# Altium PCB Ard_regulator.PcbDoc
Units mil, origin at the board's own origin, x right, y up, seen from the top; angles counter-clockwise.
Board outline 2700 x 2100 mil, 2 copper layers (Top Layer, Bottom Layer), stack 62.8 mil thick; 15 components, 31 nets, 82 pads, 0 vias.
Unrouted connection lines stored in the file: 1.
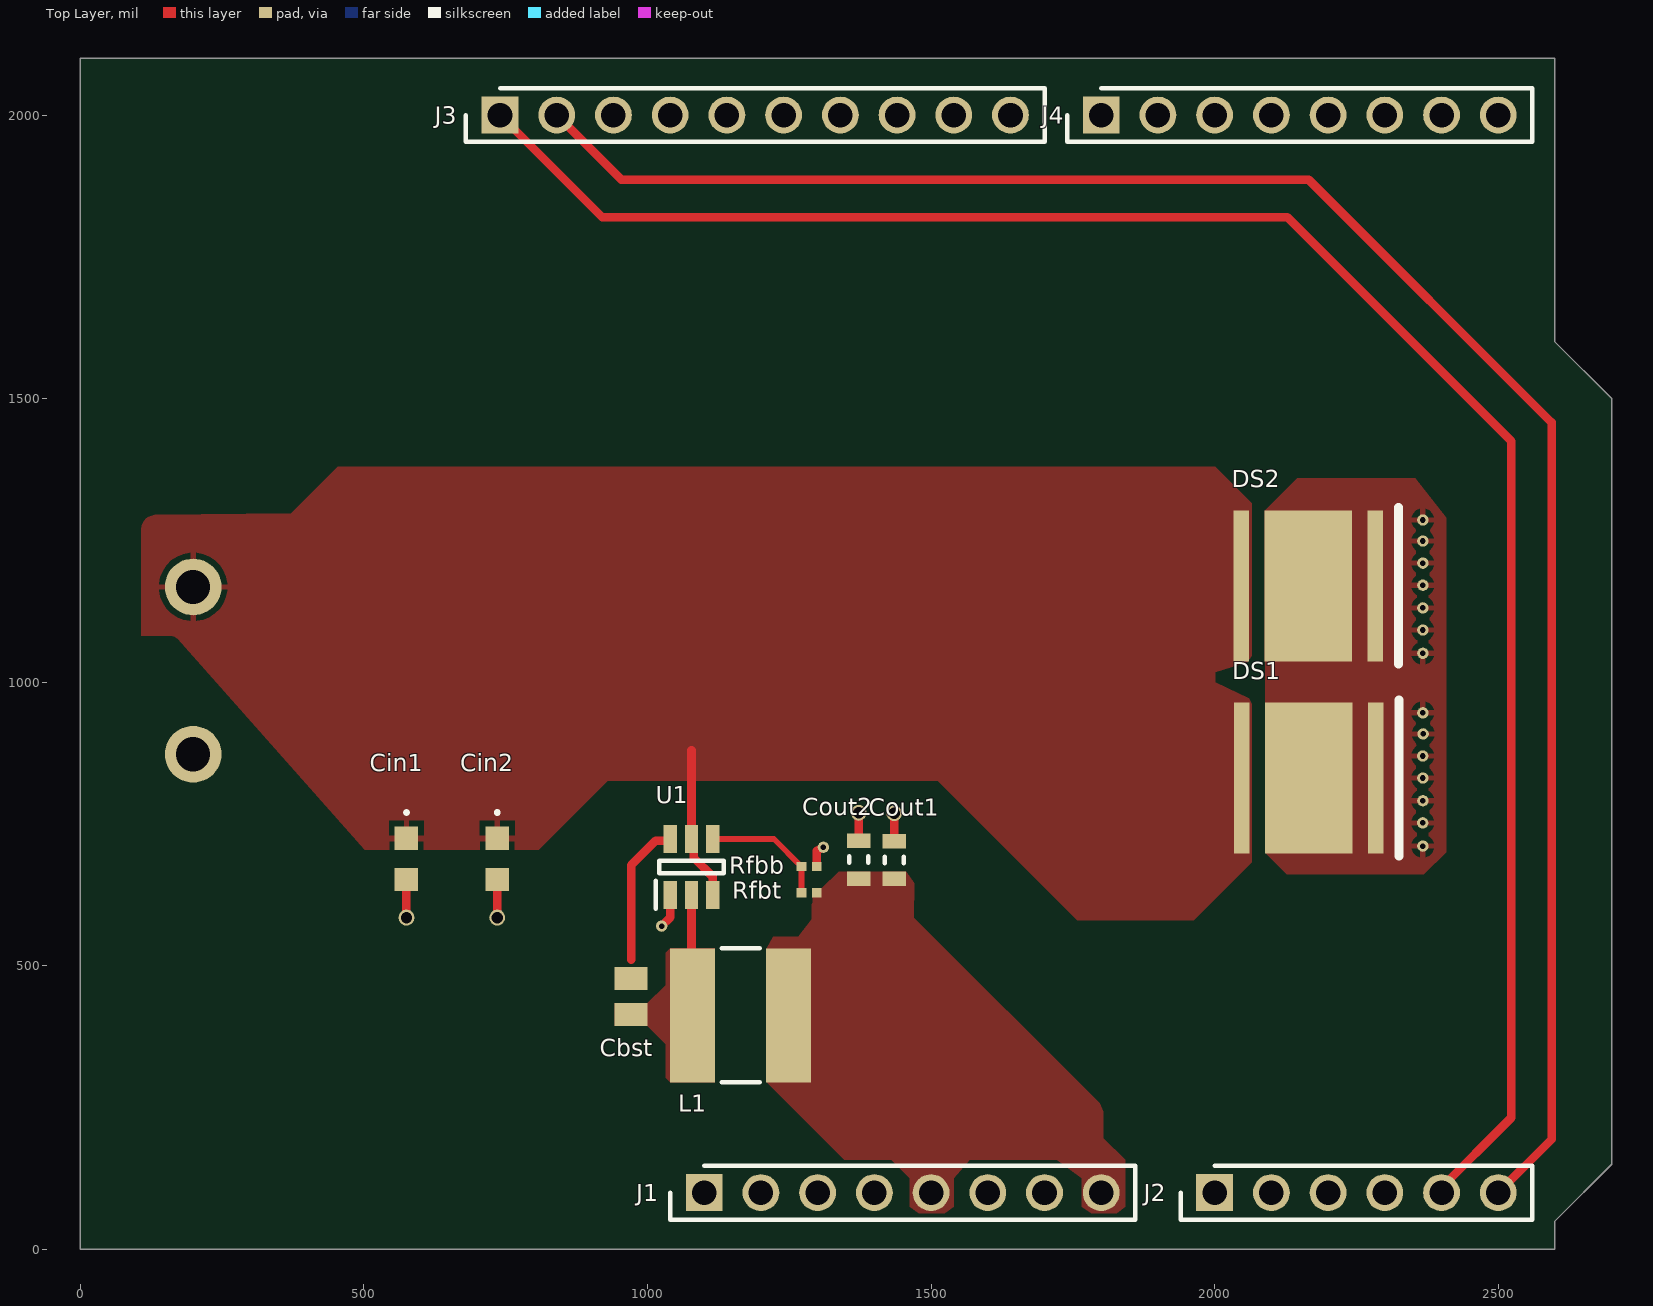
[diagram p0: Top Layer view]
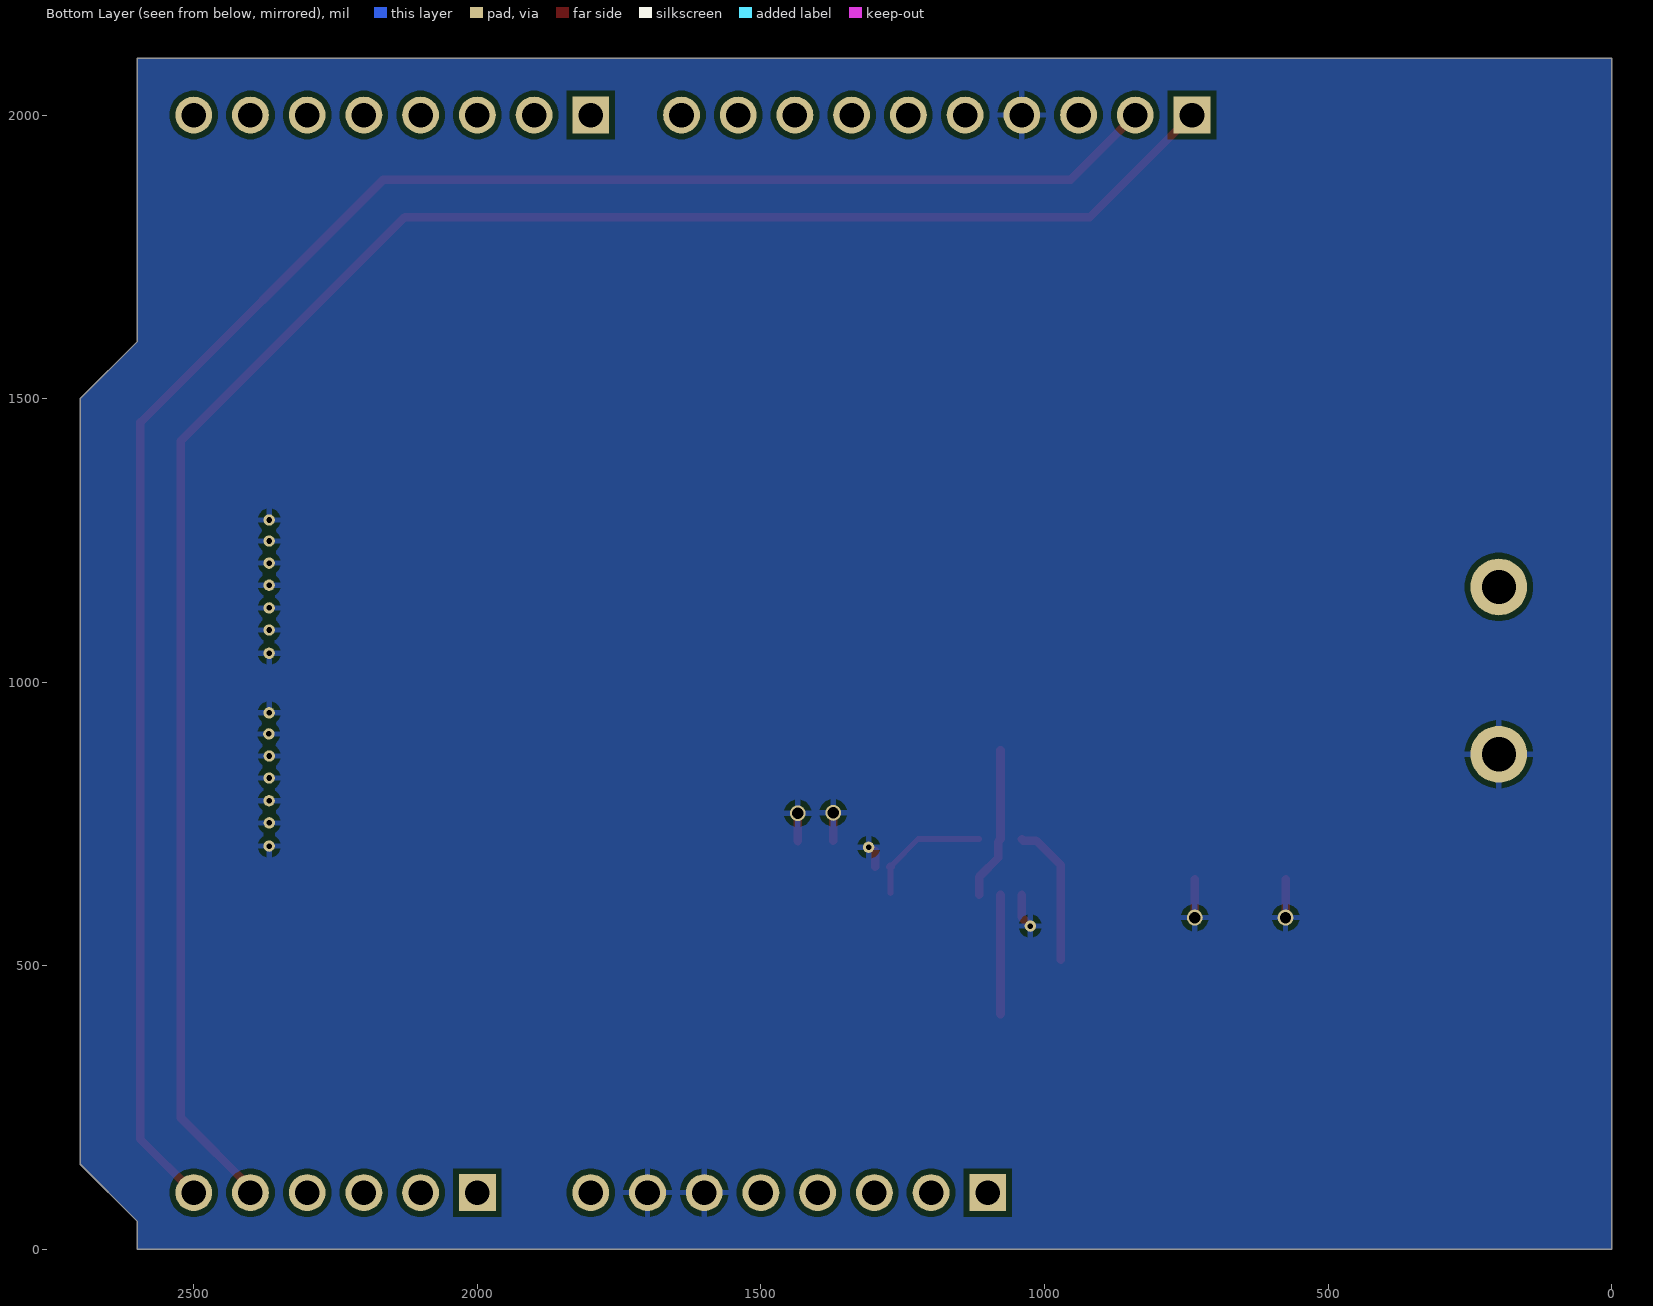
[diagram p1: Bottom Layer view, seen from below]
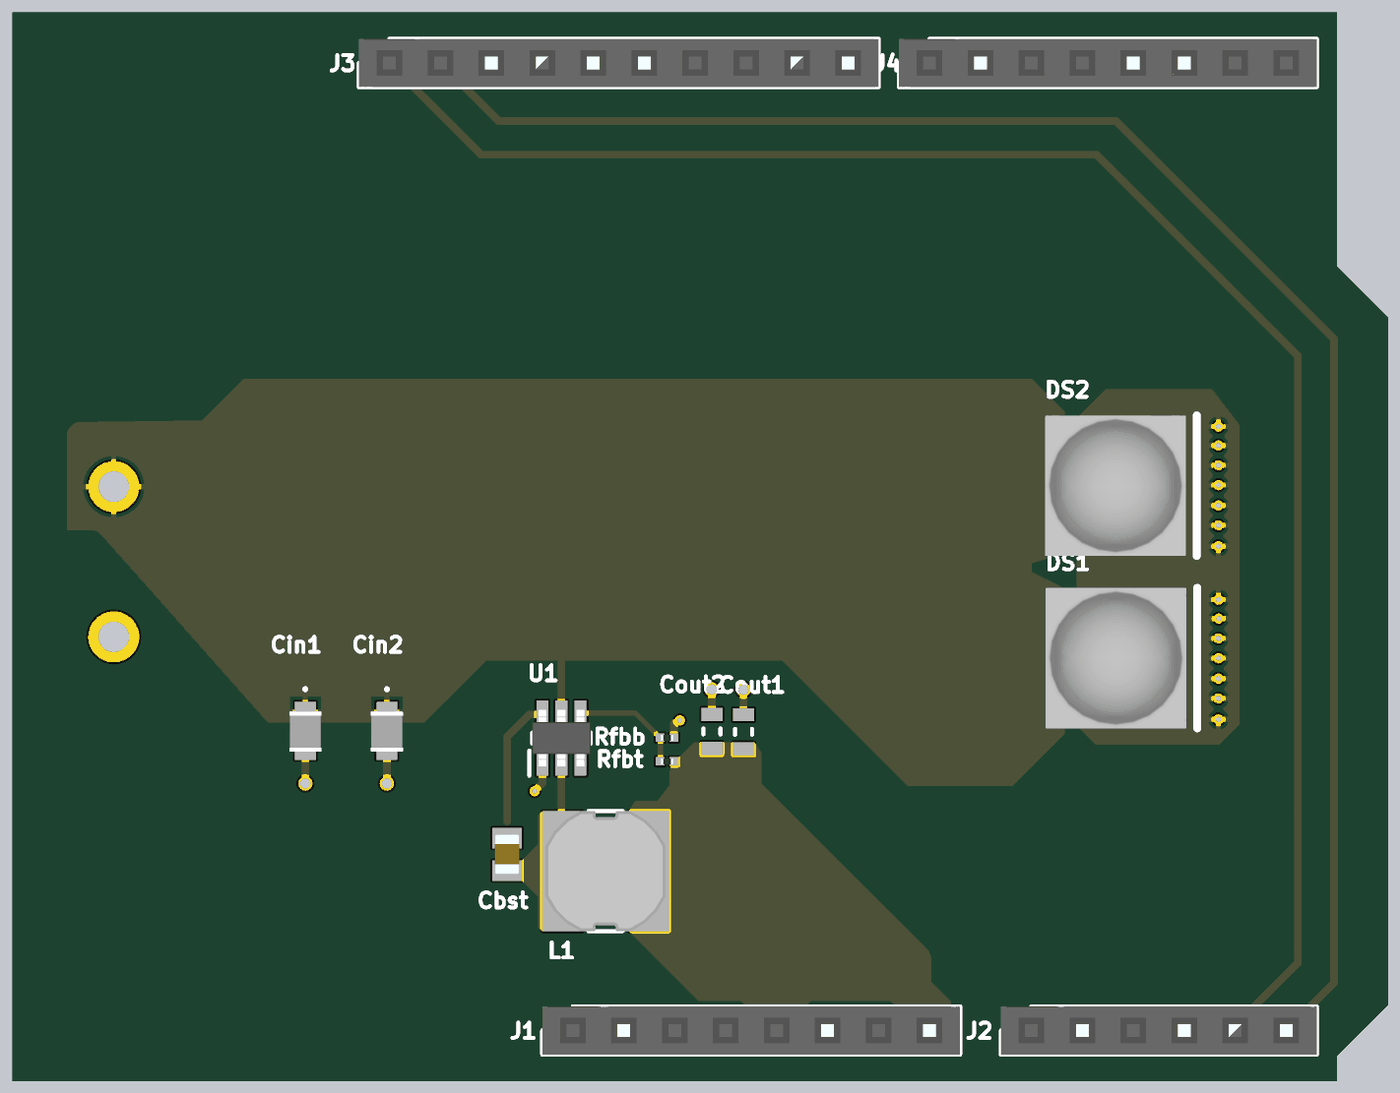
[diagram p2: 3D render of the assembled board from above, using the file's embedded part models]

## Layer stack, top to bottom
Top Solder: solder mask 0.4, Solder Resist, Dk 3.5
Top Layer: signal copper 1.4
Dielectric 1: dielectric 60, FR-4, Dk 4.8
Bottom Layer: signal copper 1.4
Bottom Solder: solder mask 0.4, Solder Resist, Dk 3.5

## Board outline
0,0 0,2100 2600,2100 2600,1600 2700,1500 2700,150 2600,50 2600,0

## Design rules (kind name [scope] priority, off if disabled: settings)
Clearance [All] p1: gap=10 ignorepadtopadclearanceinfootprint=TRUE
PolygonConnect PolygonConnect_1 [All] p1: connectstyle=Relief reliefconductorwidth=10 reliefentries=4 polygonreliefangle="90 Angle" airgapwidth=10
RoutingVias [All] p1: holewidth=10 width=18 viastyle="Through Hole" minholewidth=6 minwidth=14 maxholewidth=28 maxwidth=50
SolderMaskExpansion [All] p1: expansion=4 istentingtop=FALSE
SupplyNets "Schematic Supply Nets_4" [InNet('+5V')] p1: voltage=0.000
SupplyNets "Schematic Supply Nets_1" [InNet('+12V')] p2: voltage=0.000
SupplyNets "Schematic Supply Nets" [InNet('GND')] p3: voltage=0.000
Width [All] p1: maxlimit=30 minlimit=5 preferedwidth=10
30 further rules are at their usual default settings.

## Components (designator, comment, footprint, x,y, rotation, side; value= is the part's Value field where it differs from the comment)
Cbst "08053C104KAT2A" CAPC2012X94N 971,445.89 r90 top
Cin1 "C2012X5R1V106K085AC" C2012_Commercial 575,688.58 r270 top
Cin2 "C2012X5R1V106K085AC" C2012_Commercial 735,688.58 r270 top
Cout1 "C1608X5R1A226M080AC" CAPC1608X100X20ML10 1435,686.54 r270 top
Cout2 "C1608X5R1A226M080AC" CAPC1608X100X20ML10 1372.85,687.24 r270 top
DS1 "MKRAWT-00-0000-0D0HG235H" CREE-MK-R-2_V 2165.9,831.31 r0 top
DS2 "MKRAWT-00-0000-0D0HG235H" CREE-MK-R-2_V 2165,1170 r0 top
J1 "SSQ-108-03-T-S" RHDR8W64P254_1X8_2083X241X851P 1100,100 r180 top locked
J2 "SSQ-106-03-T-S" RHDR6W64P254_1X6_1575X241X851P 2000,100 r180 top locked
J3 "SSQ-110-03-T-S" RHDR10W64P254_1X10_2591X241X851P 740,2000 r180 top locked
J4 "SSQ-108-03-T-S" RHDR8W64P254_1X8_2083X241X851P 1800,2000 r180 top locked
L1 "SRN6045-4R7Y" SRN6045_1 1164.24,412.76 r0 top
Rfbb "RC0201FR-0710KL" RESC0603X26N 1285,675 r0 top
Rfbt "RC0201FR-0756K2L" RESC0603X26N 1285,628.46 r180 top
U1 "TPS562200DDCR" SOT95P280X110-6N 1077.6,674.21 r90 top

## Footprints (in the part's own frame and the unit in brackets; to place one, negate y for a bottom-side part, rotate by r counter-clockwise, add the part's x,y. Pads: shape width x height; smd on the part's side, far side on the other; paste and mask are expansions set on the pad)
C2012_Commercial [mm]
  rect 1.05x1.05 smd: 1(-0.925,0) 2(0.925,0)
  silkscreen extent -2.12,-0.05 -2.03,0.05, body extent -0.96,-0.8 1.04,0.8, height 1.25
CAPC1608X100X20ML10 [mm] "Chip Capacitor, 2-Leads, Body 1.70x0.90mm, IPC Low Density"
  rect 0.65x1.05 smd: 1(-0.85,0) 2(0.85,0)
  silkscreen extent -0.15,-0.43 0.15,0.43, body extent -0.85,-0.45 0.85,0.45, height 1
CAPC2012X94N [mm]
  rect 1.02x1.47 smd: 1(-0.81,0) 2(0.81,0)
  body extent -1,-0.63 1,0.63, height 0.94
CREE-MK-R-2_V [mm] "SMD, 2-Leads, Body 7x7mm, Thermal Pad 3.9x6.76mm"
  rect 0.7x6.76 smd: 1(-3,0) 2(3,0)
  rect 3.9x6.76 smd: 3(0,0)
  silkscreen extent 4.05,-3.5 4.05,3.5, body extent -3.5,-3.5 3.5,3.5, height 4.1
RESC0603X26N [mm]
  rect 0.44x0.42 smd: 1(-0.34,0) 2(0.34,0)
  body extent -0.3,-0.15 0.3,0.15, height 0.26
RHDR6W64P254_1X6_1575X241X851P [mm]
  rect 1.65x1.65 hole 1.1: 1(0,0)
  round 1.65 hole 1.1: 2(-2.54,0) 3(-5.08,0) 4(-7.62,0) 5(-10.16,0) 6(-12.7,0)
  silkscreen extent -14.23,-1.2 1.53,1.2, body extent -14.23,-1.2 1.53,1.2, height 8.51
RHDR8W64P254_1X8_2083X241X851P [mm]
  rect 1.65x1.65 hole 1.1: 1(0,0)
  round 1.65 hole 1.1: 2(-2.54,0) 3(-5.08,0) 4(-7.62,0) 5(-10.16,0) 6(-12.7,0) 7(-15.24,0) 8(-17.78,0)
  silkscreen extent -19.31,-1.2 1.53,1.2, body extent -19.31,-1.2 1.53,1.2, height 8.51
RHDR10W64P254_1X10_2591X241X851P [mm]
  rect 1.65x1.65 hole 1.1: 1(0,0)
  round 1.65 hole 1.1: 2(-2.54,0) 3(-5.08,0) 4(-7.62,0) 5(-10.16,0) 6(-12.7,0) 7(-15.24,0) 8(-17.78,0) 9(-20.32,0) 10(-22.86,0)
  silkscreen extent -24.39,-1.2 1.53,1.2, body extent -24.39,-1.2 1.53,1.2, height 8.51
SOT95P280X110-6N [mm]
  rect 1.25x0.6 smd: 1(-1.25,0.95) 2(-1.25,0) 3(-1.25,-0.95) 4(1.25,-0.95) 5(1.25,0) 6(1.25,0.95)
  silkscreen extent -1.88,-1.45 0.28,1.6, body extent -1.4,-1.45 1.4,1.45, height 0.97
SRN6045_1 [mm]
  rect 2.01x6 smd: 1(-2.15,0) 2(2.15,0)
  silkscreen extent -0.85,-3 0.85,3, body extent -3,-3 3,3, height 4.5

## Part data
Cbst: "Capacitor", Manufacturer_Name="Kyocera AVX", Mouser Part Number=581-08053C104K, Arrow Part Number=08053C104KAT2A, Arrow Price/Stock=https://www.arrow.com/en/products/08053c104kat2a/avx?utm_currency=USD&region=nac, Datasheet Link=http://datasheets.avx.com/X7RDielectric.pdf, Height=0.94mm, Manufacturer_Part_Number=08053C104KAT2A, Mouser Price/Stock=https://www.mouser.co.uk/ProductDetail/KYOCERA-AVX/08053C104KAT2A?qs=EihRZLdKnF2GcTBzDkE%2FiQ%3D%3D
Cin1 Cin2: "Capacitor", Manufacturer_Name=TDK, Mouser Part Number=810-C2012X5R1V106K0C, Arrow Part Number=C2012X5R1V106K085AC, Arrow Price/Stock=https://www.arrow.com/en/products/c2012x5r1v106k085ac/tdk?region=nac, Datasheet Link=https://product.tdk.com/system/files/dam/doc/product/capacitor/ceramic/mlcc/catalog/mlcc_commercial_general_en.pdf, Height=0.75mm, Manufacturer_Part_Number=C2012X5R1V106K085AC, Mouser Price/Stock=https://www.mouser.co.uk/ProductDetail/TDK/C2012X5R1V106K085AC?qs=6JAMGB%252BEdky%252BlYMcTLhFyA%3D%3D
Cout1 Cout2: library part CMP-2000-05441-1, "Chip Capacitor, 22 uF, +/- 20%, 10 V, -55 to 85 degC, 0603 (1608 Metric), RoHS, Tape and Reel", Capacitance=22µF, Manufacturer=TDK, Operating Temperature=-55degC~85degC, Package / Case=0603(1608Metric), Package Description="2-Pin Surface Mount Device, Body 1.6 x 0.8 mm", Package Reference=603, PCN Part Number=MLCCPartNumberChange30/Nov/2012, Ratings=-, Standard Package=1, Temperature Coefficient=X5R, Tolerance=±20%, Voltage - Rated=10V, Applications=GeneralPurpose, Category=Capacitors, Datasheet URL=http://download.siliconexpert.com/pdfs/2015/4/21/15/54/45/779/tdk_/manual/37024850441143360mlcc_commercial_general_en.pdf, Datasheet Version=Mar-15, Design Resources=20WNon-IsolatedBuckLEDDriverUsingPLLNK460KG, Family=CeramicCapacitors, Features=-, Height - Seated (Max)=-, Kits=445-9014-KIT-ND-KITMLCC100PF-22UF060310-50V, Lead Spacing=-, Lead Style=-, Manufacturer URL=http://www.tdk.com/, Mounting Type=SurfaceMount,MLCC, Online Catalog=CSeries,GeneralPurpose, Other Names=445-9077-1, Packaging=CutTape(CT), Product Training Modules=CSeriesGeneralApplicationsSEAT,CCV,andTVCLDesignToolsGuidetoReplacinganElectrolyticCapacitorwithanMLCC, RoHS Information=RoHSCertificate-MLCC, Series=C, Size / Dimension="0.063\"Lx0.031\"W(1.60mmx0.80mm)", Thickness (Max)="0.035\"(0.90mm)"
DS1 DS2: library part CMP-2100-00977-1, "LED, White, 12 V, 2-Pin SMD, RoHS, Tape and Reel"
J1 J4: "Connector", Manufacturer_Name=SAMTEC, Mouser Part Number=200-SSQ10803TS, Arrow Part Number=SSQ-108-03-T-S, Arrow Price/Stock=https://www.arrow.com/en/products/ssq-108-03-t-s/samtec?region=nac, Datasheet Link=http://suddendocs.samtec.com/prints/ssq-1xx-xx-xxx-x-xx-xxx-xx-x-mkt.pdf, Height=8.51mm, Manufacturer_Part_Number=SSQ-108-03-T-S, Mouser Price/Stock=https://www.mouser.co.uk/ProductDetail/Samtec/SSQ-108-03-T-S?qs=rU5fayqh%252BE3sJVWDTx5zyQ%3D%3D
J2: "Connector", Manufacturer_Name=SAMTEC, Mouser Part Number=200-SSQ10603TS, Arrow Part Number=SSQ-106-03-T-S, Arrow Price/Stock=https://www.arrow.com/en/products/ssq-106-03-t-s/samtec?region=nac, Datasheet Link=http://suddendocs.samtec.com/prints/ssq-1xx-xx-xxx-x-xx-xxx-xx-x-mkt.pdf, Height=8.51mm, Manufacturer_Part_Number=SSQ-106-03-T-S, Mouser Price/Stock=https://www.mouser.co.uk/ProductDetail/Samtec/SSQ-106-03-T-S?qs=rU5fayqh%252BE1MgKYVKa8USw%3D%3D
J3: "Connector", Manufacturer_Name=SAMTEC, Mouser Part Number=200-SSQ11003TS, Arrow Part Number=SSQ-110-03-T-S, Arrow Price/Stock=https://www.arrow.com/en/products/ssq-110-03-t-s/samtec?region=nac, Datasheet Link=http://suddendocs.samtec.com/prints/ssq-1xx-xx-xxx-x-xx-xxx-xx-x-mkt.pdf, Height=8.51mm, Manufacturer_Part_Number=SSQ-110-03-T-S, Mouser Price/Stock=https://www.mouser.co.uk/ProductDetail/Samtec/SSQ-110-03-T-S?qs=rU5fayqh%252BE0uAJE8UTgxfA%3D%3D
L1: "Inductor", Manufacturer_Name=Bourns, Mouser Part Number=652-SRN6045-4R7Y, Arrow Part Number=SRN6045-4R7Y, Arrow Price/Stock=https://www.arrow.com/en/products/srn6045-4r7y/bourns?utm_currency=USD&region=nac, Datasheet Link=https://www.bourns.com/data/global/pdfs/SRN6045.pdf, Manufacturer_Part_Number=SRN6045-4R7Y, Mouser Price/Stock=https://www.mouser.co.uk/ProductDetail/Bourns/SRN6045-4R7Y?qs=opBjA1TV902tB4tumIiZhg%3D%3D
Rfbb: "Resistor", Manufacturer_Name=KEMET, Mouser Part Number=603-RC0201FR-0710KL, Datasheet Link=http://www.yageo.com/documents/recent/PYu-RC0201_51_RoHS_L_8.pdf, Height=0.26mm, Manufacturer_Part_Number=RC0201FR-0710KL, Mouser Price/Stock=https://www.mouser.co.uk/ProductDetail/YAGEO/RC0201FR-0710KL?qs=FLc6udek5PS1AiJCgpc6bQ%3D%3D
Rfbt: "Resistor", Manufacturer_Name=KEMET, Mouser Part Number=603-RC0201FR-0756K2L, Arrow Part Number=RC0201FR-0756K2L, Arrow Price/Stock=https://www.arrow.com/en/products/rc0201fr-0756k2l/yageo?region=nac, Datasheet Link=http://www.yageo.com/documents/recent/PYu-RC0201_51_RoHS_L_8.pdf, Height=0.26mm, Manufacturer_Part_Number=RC0201FR-0756K2L, Mouser Price/Stock=https://www.mouser.co.uk/ProductDetail/YAGEO/RC0201FR-0756K2L?qs=Q4gDqC5t5%2FD3%2Fkjmz2Nr%2Fw%3D%3D
U1: "Undefined or Miscellaneous", Manufacturer_Name="Texas Instruments", Mouser Part Number=595-TPS562200DDCR, Arrow Part Number=TPS562200DDCR, Arrow Price/Stock=https://www.arrow.com/en/products/tps562200ddcr/texas-instruments?region=europe, Datasheet Link=http://www.ti.com/lit/gpn/tps562200, Height=1.1mm, Manufacturer_Part_Number=TPS562200DDCR, Mouser Price/Stock=https://www.mouser.co.uk/ProductDetail/Texas-Instruments/TPS562200DDCR?qs=7wMBv%2Ftbz9Jdis0htpD4wA%3D%3D

## Free pads (board coordinates)
  round 100 hole 60: 4(199,873) 4(199,1168)
  round 28 hole 20: 6(575,585) 6(735,585) 6(1372.44,769.71) 6(1435,769)
  round 20 hole 10: 6(1025,570) 6(1310,709)
  round 20 hole 10 unplated: 6(2366.85,751.99) 6(2366.85,869.9) 6(2367,711) 6(2367,791) 6(2367,831) 6(2367,946) 6(2367,1051) 6(2367,1091.99) 6(2367,1131) 6(2367,1171) 6(2367,1209.9) 6(2367,1248.86) 6(2367,1286) 6(2367.54,908.86)

## Nets (pads, with @x,y where several pads share a name; then routed paths per layer and width w, separated by ;. In a path a pad name is that pad's centre, name@x,y a point inside that pad or via, vN(x,y) a via of type N, cw(c..) or ccw(c..) an arc to the next point about the centre after c; other vN are vias at no path point)
3.3V: J1.4
+5V: Cout1.2 Cout2.2 J1.5 J1.8 L1.2 Rfbt.1
+12V: Cin1.1 Cin2.1 DS1.1 DS2.1 pad.4@199,1168 U1.3 U1.5 | length 271.4
  Top Layer w15: 1078,880 1077.6,879.6 U1.5 ; U1.5@1078.09,722.94 U1.5 ; U1.3 1115,657 1081.91,690.09 1081.91,719.11 U1.5
A0: J2.1
A1: J2.2
A2: J2.3
A3: J2.4
A4: J2.5 J3.1 | length 3394.5
  Top Layer w15: J3.1 920,1820 2128,1820 2523,1425 2523,232 J2.5@2395.5,104.5
A5: J2.6 J3.2 | length 3375.4
  Top Layer w15: J3.2 954,1886 2166,1886 2594,1458 2594,194 J2.6
AREF: J3.3
D0: J4.8
D1: J4.7
D2: J4.6
D3: J4.5
D4: J4.4
D5: J4.3
D6: J4.2
D7: J4.1
D8: J3.10
D9: J3.9
D10: J3.8
D11: J3.7
D12: J3.6
D13: J3.5
GND: Cin1.2 Cin2.2 Cout1.1 Cout2.1 DS1.2 DS1.3 DS2.2 DS2.3 J1.6 J1.7 J3.4 pad.4@199,873 pad.6 Rfbb.2 U1.1 | length 334.6
  Top Layer w15: pad.6@575,585 Cin1.2 ; pad.6@735,585 Cin2.2 ; pad.6@1025,570 1040.2,585.2 U1.1 ; Rfbb.2 1298.44,675.05 1298.44,702.48 pad.6@1310,709 ; pad.6@1372.44,769.71 1372.65,769.51 1372.65,720.91 Cout2.1 ; Cout1.1 pad.6@1435,769
IOREF: J1.2
N-C: J1.1
NetCbst_1: Cbst.1 L1.1 U1.2 | length 210.3
  Top Layer w15: L1.1@1077.6,414.75 U1.2
NetCbst_2: Cbst.2 U1.6 | length 254.6
  Top Layer w15: 971.14,510.79 971.14,677.14 1014.67,720.67 1037.44,720.67 U1.6
RESET: J1.3
VFB: Rfbb.1 Rfbt.2 U1.4 | length 223.2
  Top Layer w10: U1.4 1222.8,723.43 Rfbb.1@1271.22,675 ; Rfbt.2 Rfbb.1
  Top Layer w15: Rfbb.1@1271.22,675 Rfbb.1

## Polygon pours and split planes (outlines as drawn)
+12V on Top Layer "+12V_L01_P005" (solid, pour order 5): 107,1267.89 107,1082.16 156.16,1082.16 cw(c156.94,1059.7) 171.93,1076.45 501.36,704.64 808.64,704.64 930,826 1512,826 1758,580 1963,580 2065.62,682.62 2065.62,962.02 2059.68,971.49 2001,999.86 2001,1017.37 2057.27,1034.92 2065.62,1046.28 2065.62,1315.38 2001,1380 454,1380 372.07,1298.07 133.73,1294.97 ccw(c134.07,1267.9)
+5V on Top Layer "+5V_L01_P007" (solid, pour order 7): 1210,531 1210,295 1347,158 1429.94,158 1462,125.23 1462,75 1478.27,63.5 1523.73,63.5 1540,75 1540,125.23 1568,158 1722,158 1766,125.23 1766,75 1782,63.5 1827.73,63.5 1842,75 1842,158 1804,196 1804,243 1797.78,257.22 1469.89,585.11 1470.09,645.25 1456.46,666 1337,666 1307.67,636.67 1291.07,636.67 1289.83,636.67 1289.74,620.33 1291.47,617.97 1291.44,611.79 1289.83,607.58 1290.01,582 1266,551 1222,551
NetCbst_1 on Top Layer "NETCBST_1_L01_P006" (solid, pour order 6): 942,434 942,394 1000,394 1032,361.99 1032,303 1040,295 1119,295 1119,531 1040,531 1032,523 1032,466 1000,434
GND on Top Layer "GND_L01_P001" (solid, pour order 1): 2088,1037 2089,1036 2089,699 2127,661 2369,661 2408,700 2408,1290 2354,1360 2146,1360 2088,1302 2088,1270
GND on Bottom Layer "GND_L02_P000" (solid, pour order 0): 2600,0 2600,50 2700,150 2700,1500 2600,1600 2600,2100 0,2100 0,0